# Altium PCB ControlTemp.PcbDoc
Units mm, origin at the board's own origin, x right, y up, seen from the top; angles counter-clockwise.
Board outline 88.2 x 92.5 mm, 2 copper layers (Top Layer, Bottom Layer); 32 components, 37 nets, 127 pads, 1 vias.
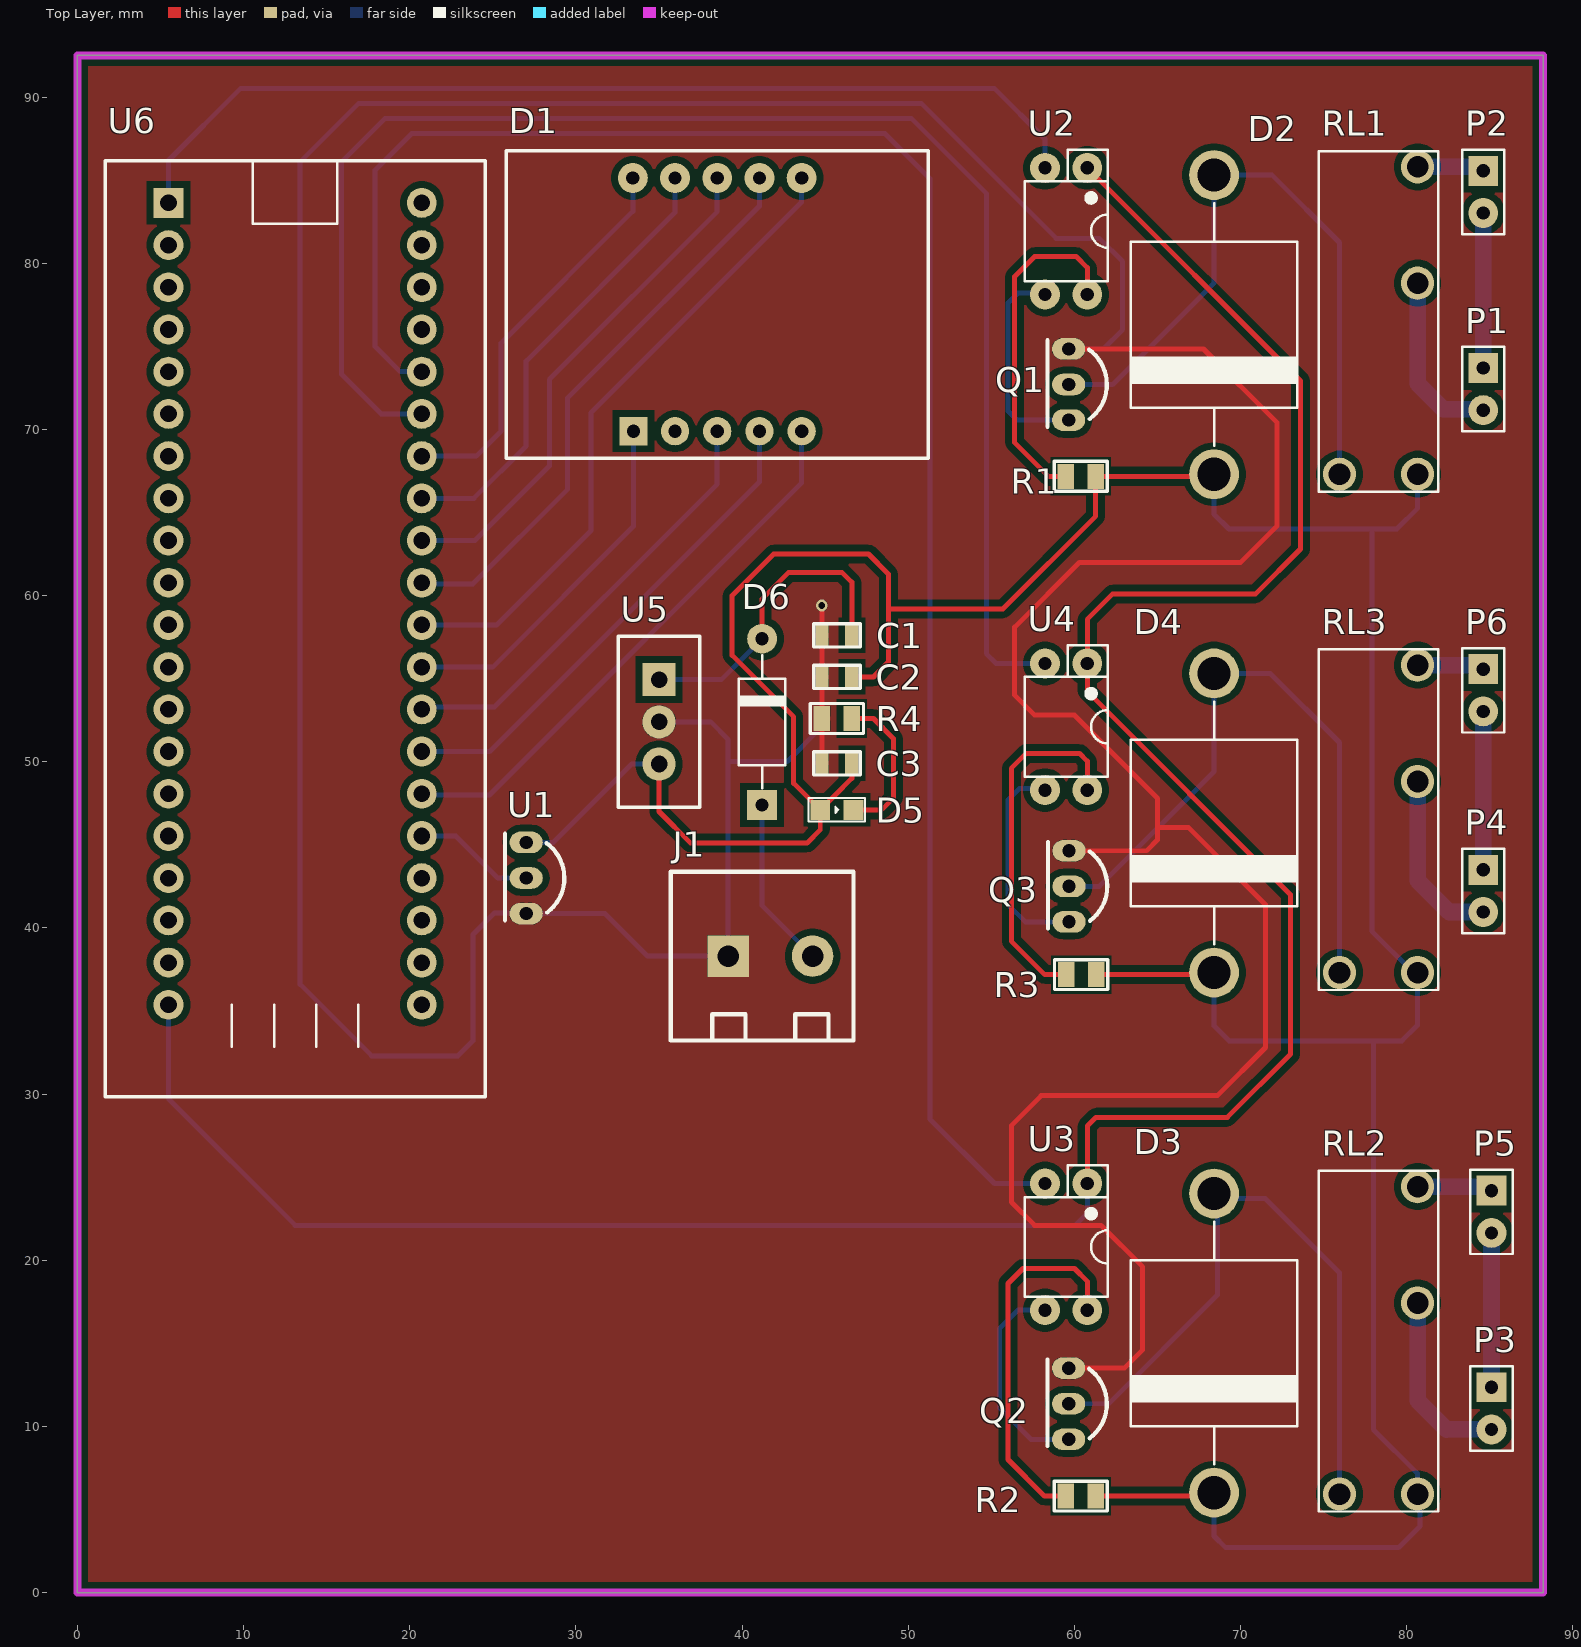
[diagram p0: Top Layer view]
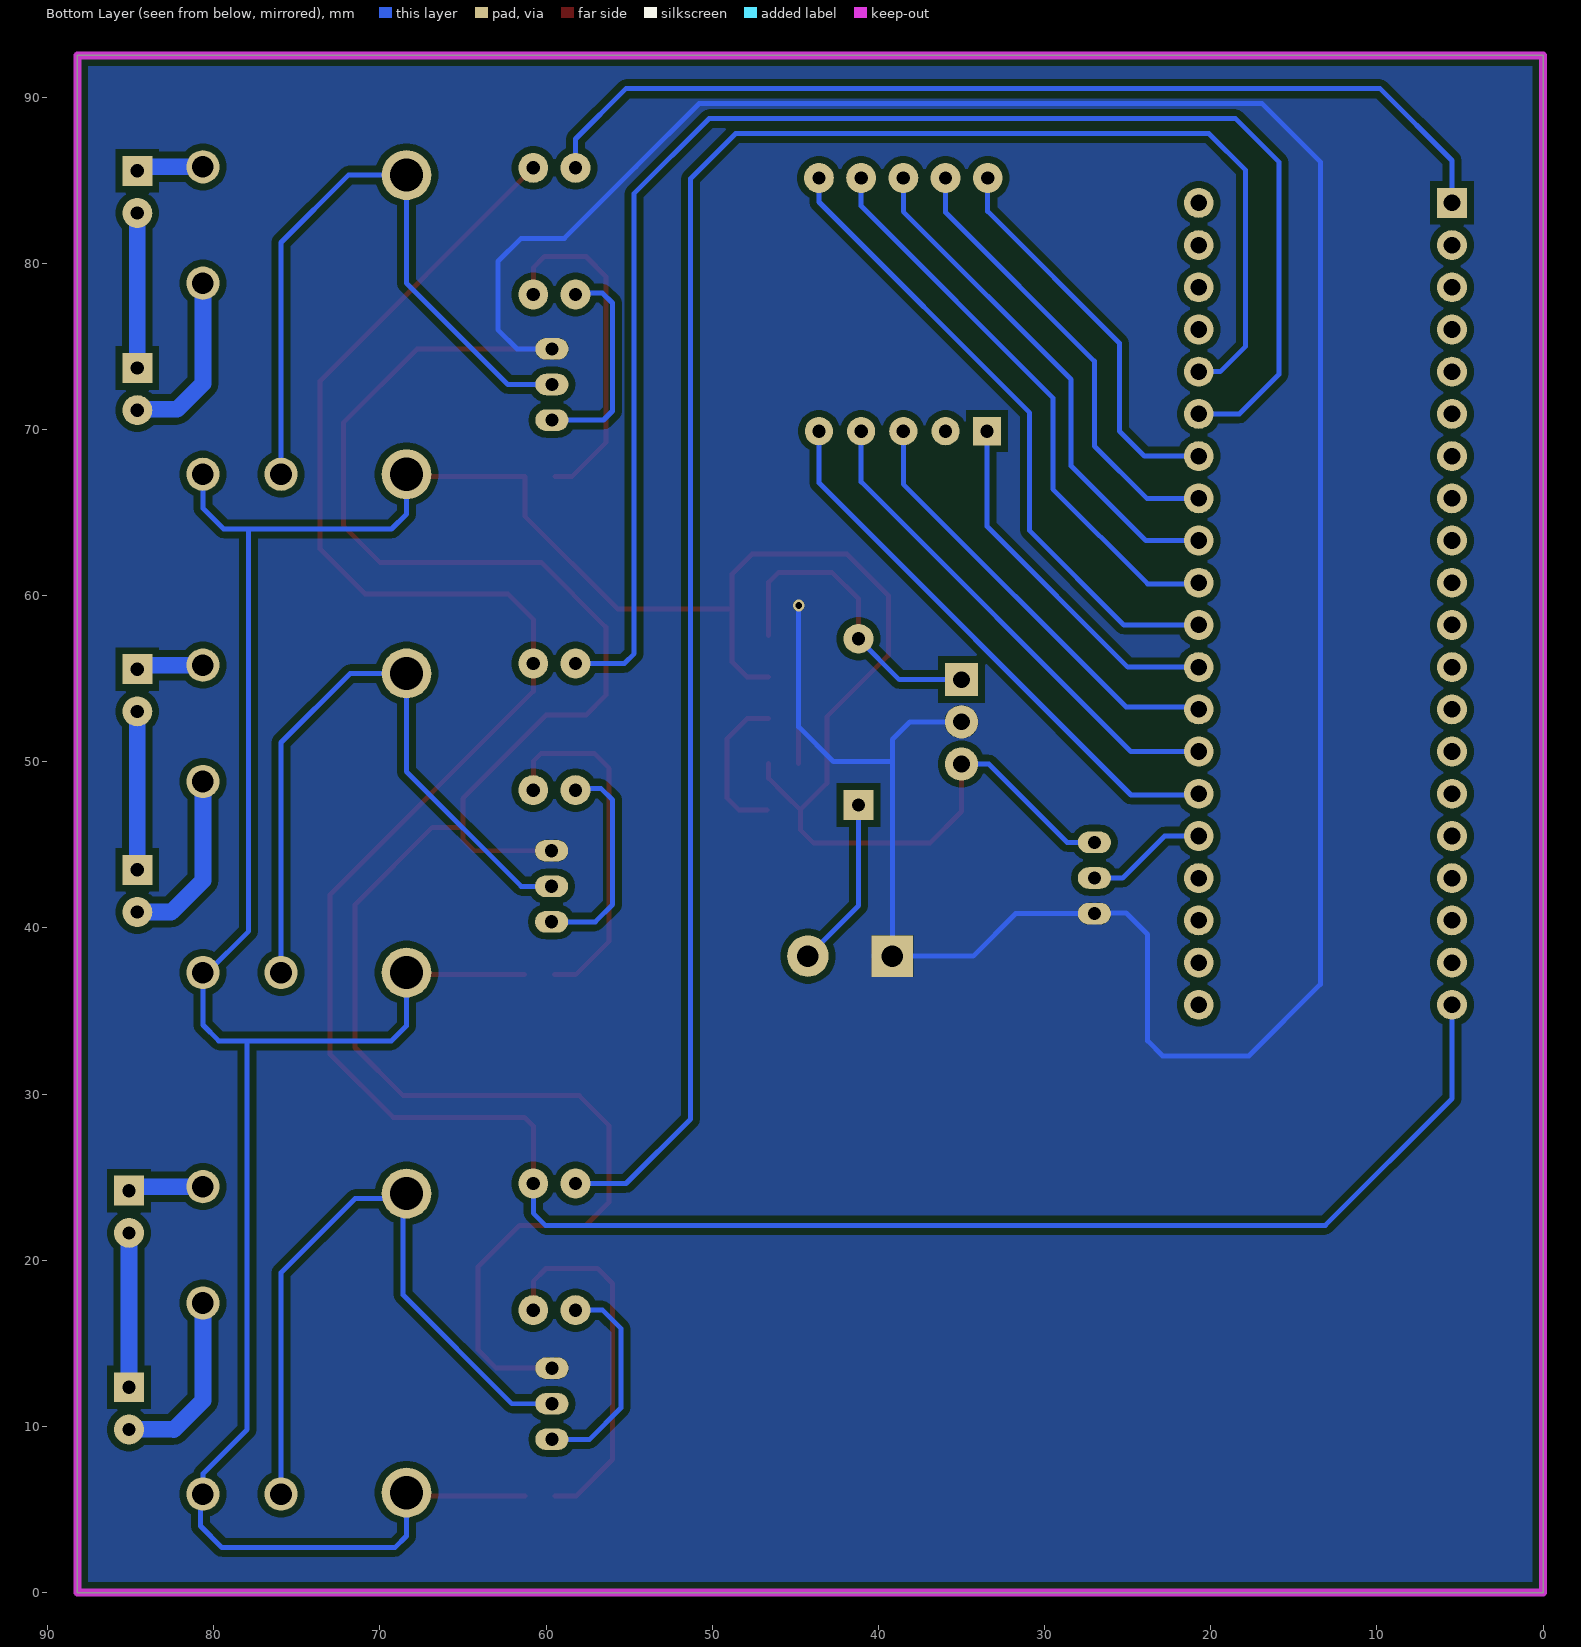
[diagram p1: Bottom Layer view, seen from below]
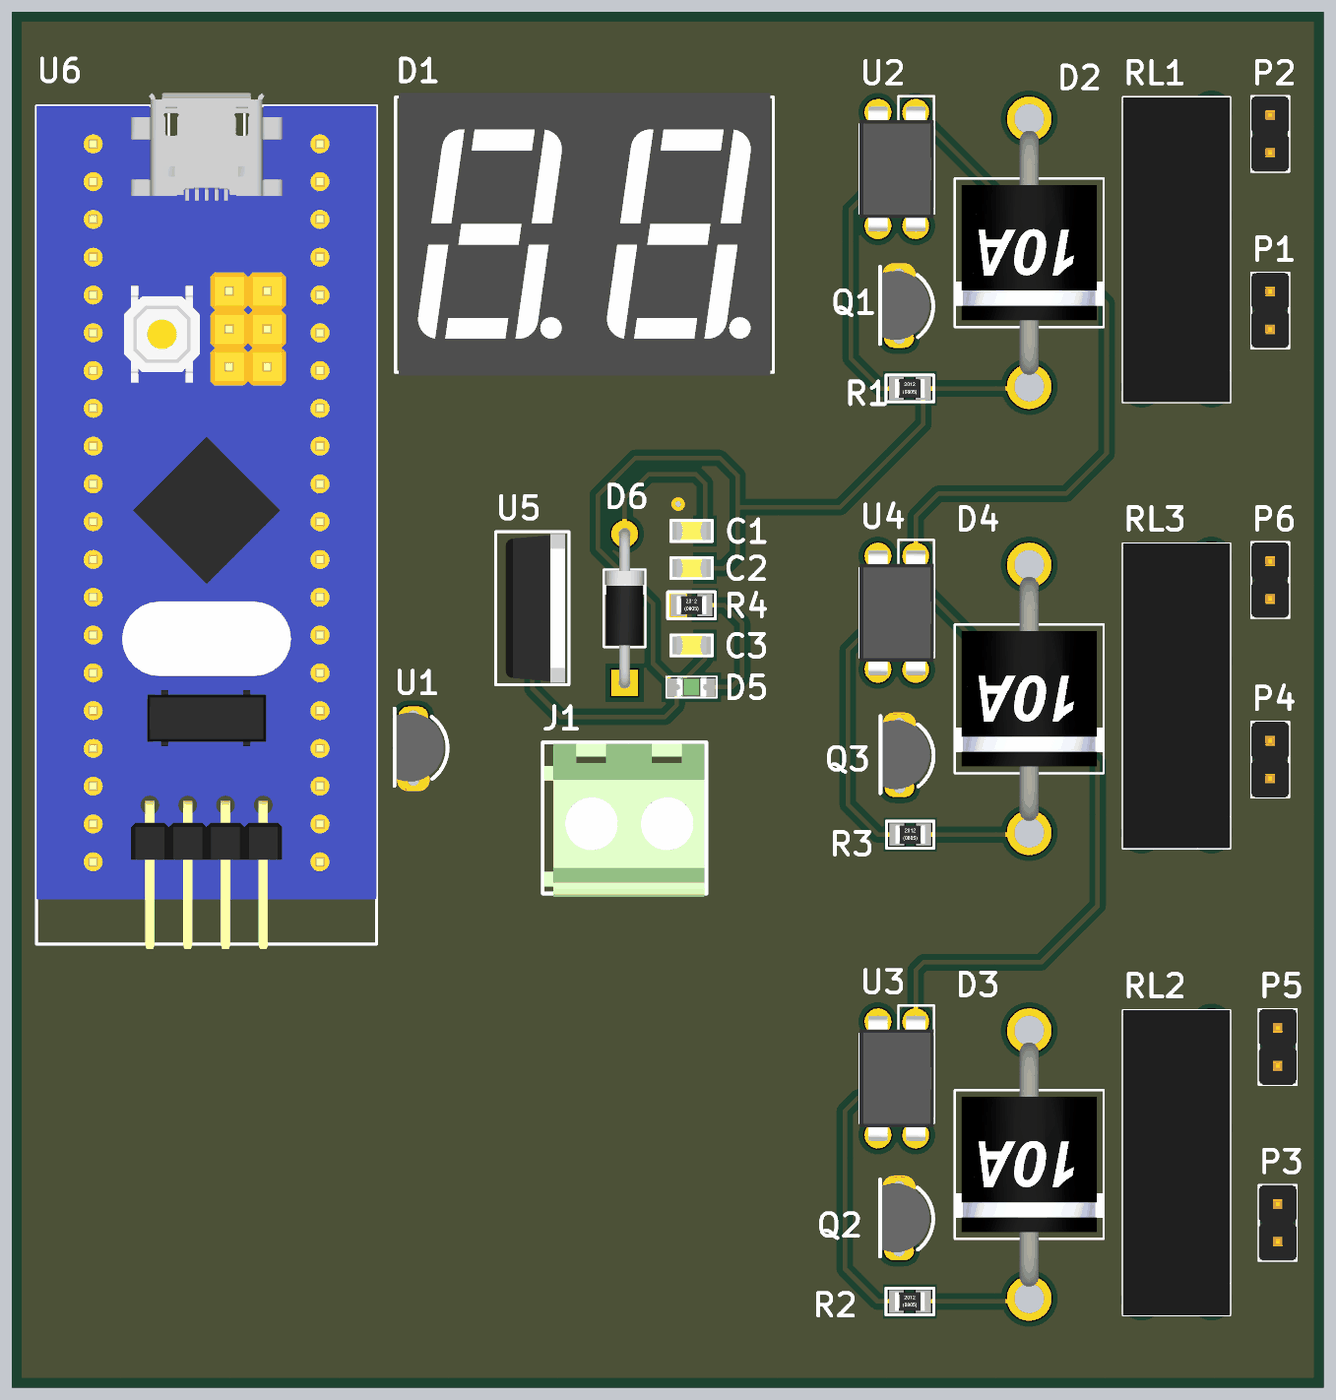
[diagram p2: 3D render of the assembled board from above, using the file's embedded part models]

## Layer stack, top to bottom
Top Solder: solder mask 0.0102, Solder Resist, Dk 3.5
Top Layer: signal copper 0.0356
Dielectric 1: dielectric 0.32, FR-4, Dk 4.8
Bottom Layer: signal copper 0.0356
Bottom Solder: solder mask 0.0102, Solder Resist, Dk 3.5

## Board outline
0,0 0,92.5 88.2,92.5 88.2,0

## Design rules (kind name [scope] priority, off if disabled: settings)
Clearance [All] p1: gap=0.4 ignorepadtopadclearanceinfootprint=FALSE
PlaneClearance [All] p1: clearance=0.3
PlaneConnect [All] p1: planeconnectstyle=Relief reliefexpansion=0.2 reliefentries=4 reliefconductorwidth=0.2 reliefairgap=0.2
PolygonConnect [InNetClass('Load_Class')] p1: connectstyle=Direct reliefconductorwidth=0.254 reliefentries=4 polygonreliefangle="90 Angle" airgapwidth=0.254
RoutingVias RoutingVias_Display [InNetClass('Display_Class')] p1: holewidth=0.4 width=0.7 viastyle="Through Hole" minholewidth=0.4 minwidth=0.7 maxholewidth=0.4 maxwidth=0.7
RoutingVias RoutingVias_Power_SenAct [InNetClass('Power_SenAct_Class')] p2: holewidth=0.7 width=1.1 viastyle="Through Hole" minholewidth=0.7 minwidth=1.1 maxholewidth=0.7 maxwidth=1.1
RoutingVias RoutingVias_Power_MCU [InNetClass('Power_MCU_Class')] p3: holewidth=0.7 width=1.1 viastyle="Through Hole" minholewidth=0.7 minwidth=1.1 maxholewidth=0.7 maxwidth=1.1
RoutingVias RoutingVias_Other [All] p4: holewidth=0.4 width=0.7 viastyle="Through Hole" minholewidth=0.4 minwidth=0.7 maxholewidth=0.4 maxwidth=0.7
SolderMaskExpansion [All] p1: expansion=0.102 istentingtop=FALSE
Width Width_Load [InNetClass('Load_Class')] p1: maxlimit=1 minlimit=1 preferedwidth=1
Width Width_Other [InNetClass('All Nets')] p2: maxlimit=0.3 minlimit=0.3 preferedwidth=0.3
28 further rules are at their usual default settings.

## Classes and differential pairs
net class Load_Class: NetP1_1 NetP1_2 NetP2_1 NetP3_1 NetP3_2 NetP4_1 NetP4_2 NetP5_1 NetP6_1
component class [02]-STM32F030C8T6: U6

## Components (designator, comment, footprint, x,y, rotation, side; value= is the part's Value field where it differs from the comment)
C1 "100uF" CAPC0805 45.7,57.6 r0 top
C2 "100uF" CAPC0805 45.7,55.1 r0 top
C3 "100uF" CAPC0805 45.7,49.9 r0 top
D1 "7 Segment 2 Figures" 5621BS 38.5,77.51 r0 top
D2 "Diode" 10A10 68.4,76.3 r270 top
D3 "Diode" 10A10 68.4,15.01 r270 top
D4 "Diode" 10A10 68.4,46.31 r270 top
D5 "LED_Green" "LED SMD 0805" 45.7,47.1 r0 top
D6 "1N400x" 1N400x 41.2,51.898 r90 top
J1 "12Vin" domino_2_pin 41.7,38.3 r0 top
P1 "Header 1*2 Pins" HDR_M_2_PINS_2.54 84.6,72.423 r270 top
P2 "Header 1*2 Pins" HDR_M_2_PINS_2.54 84.6,84.287 r270 top
P3 "Header 1*2 Pins" HDR_M_2_PINS_2.54 85.1,11.083 r270 top
P4 "Header 1*2 Pins" HDR_M_2_PINS_2.54 84.6,42.223 r270 top
P5 "Header 1*2 Pins" HDR_M_2_PINS_2.54 85.1,22.912 r270 top
P6 "Header 1*2 Pins" HDR_M_2_PINS_2.54 84.6,54.296 r270 top
Q1 "NPN" to-92 59.648,72.7 r270 top
Q2 "NPN" to-92 59.648,11.36 r270 top
Q3 "NPN" to-92 59.673,42.5 r270 top
R1 "10kR" RESC0805 60.375,67.175 r0 top
R2 "10kR" RESC0805 60.375,5.8 r0 top
R3 "10kR" RESC0805 60.4,37.185 r0 top
R4 "220R" RESC0805 45.7,52.6 r0 top
RL1 "Relay" "Relay G5NB" 78.3,76.5 r90 top
RL2 "Relay" "Relay G5NB" 78.3,15.125 r90 top
RL3 "Relay" "Relay G5NB" 78.3,46.51 r90 top
U1 "Sensor" to-92 27,43 r270 top
U2 "Optocoupler" "DIP 4" 59.5,81.927 r270 top
U3 "Optocoupler" "DIP 4" 59.5,20.8 r270 top
U4 "Optocoupler" "DIP 4" 59.5,52.1 r270 top
U5 "LM7805" LM7805 35,52.398 r270 top
U6 "STM32F103C8T6_BluePill" STM32F103C8T6_BluePill 13.1,59.5 r0 top

## Footprints (in the part's own frame and the unit in brackets; to place one, negate y for a bottom-side part, rotate by r counter-clockwise, add the part's x,y. Pads: shape width x height; smd on the part's side, far side on the other; paste and mask are expansions set on the pad)
1N400x [mm] "x = 1,...,7"
  rect 1.8x1.8 hole 0.8: 1(-4.5,0)
  round 1.8 hole 0.8: 2(5.5,0)
  silkscreen extent -3.5,-1.4 4.5,1.4, body extent -4.85,-1.25 5.86,1.25, height 2.6
10A10 [mm] "Diode 10A"
  round 3 hole 2: 1(-9,0) 2(9,0)
  silkscreen extent -7.3,-5 7.3,5, body extent -8.2,-4.55 8.2,4.55, height 9.55
5621BS [mm] "0.56 inches, 10 pins"
  rect 1.7x1.7 hole 0.8: 1(-5.04,-7.62)
  round 1.7 hole 0.8: 2(-2.54,-7.62) 3(0,-7.62) 4(2.54,-7.62) 5(5.08,-7.62)
  round 1.8 hole 0.8: 6(5.08,7.62) 7(2.54,7.62) 8(0,7.62) 9(-2.54,7.62) 10(-5.08,7.62)
  silkscreen extent -12.7,-9.25 12.7,9.25, body extent -12.5,-9.46 12.5,9.54, height 8
CAPC0805 [mm] "Length: 2mm, Width: 1.3mm"
  rect 0.8x1.3 smd: 1(-0.9,0) 2(0.9,0)
  silkscreen extent -1.4,-0.7 1.4,0.7, body extent -1,-0.62 1,0.63, height 0.8
"DIP 4" [mm]
  round 1.8 hole 0.8: 1(-3.81,1.27) 2(-3.81,-1.27) 3(3.81,-1.27) 4(3.81,1.27)
  silkscreen extent -4.9,-2.5 3,2.5, body extent -4.57,-2.5 4.57,2.5, height 3.6
domino_2_pin [mm]
  rect 2.5x2.5 hole 1.3: 1(-2.54,0)
  round 2.5 hole 1.3: 2(2.54,0)
  silkscreen extent -6,-5.08 5,5.08, body extent -5.88,-5.3 4.88,5, height 14.19
HDR_M_2_PINS_2.54 [mm] "0.65x0.45, Male, distance = 2.54mm, straight"
  rect 1.8x1.8 hole 0.8: 1(-1.27,0)
  round 1.8 hole 0.8: 2(1.27,0)
  silkscreen extent -2.54,-1.27 2.54,1.27, body extent -2.54,-1.27 2.54,1.27, height 9.89
"LED SMD 0805" [mm] "SMD 0805"
  rect 1.2x1.2 smd: 1(-1,0) 2(1,0)
  silkscreen extent -1.7,-0.7 1.7,0.7, body extent -1,-0.63 1,0.62, height 0.8
LM7805 [mm]
  rect 2x2 hole 1: 1(-2.54,0)
  round 2 hole 1: 2(0,0) 3(2.54,0)
  silkscreen extent -5.15,-2.45 5.15,2.45, body extent -5,-1.8 5,2.21, height 21
"Relay G5NB" [mm] "4 Pins"
  round 2 hole 1.3: 1(-9.2,-2.35) 2(2.3,-2.35) 3(9.3,-2.35) 4(-9.2,2.35)
  silkscreen extent -10.25,-3.6 10.25,3.6, body extent -10.25,-3.6 10.25,3.6, height 15.3
RESC0805 [mm] "Length: 2mm, Width: 1.3mm"
  rect 1x1.5 smd: 1(-0.9,0) 2(0.9,0)
  silkscreen extent -1.6,-0.9 1.6,0.9, body extent -1,-0.62 1,0.63, height 0.45
STM32F103C8T6_BluePill [mm] "STM32F103C8T6_BluePill"
  rect 1.8x1.8 hole 1: 1(-7.62,24.13)
  round 1.8 hole 1: 2(-7.62,21.59) 3(-7.62,19.05) 4(-7.62,16.51) 5(-7.62,13.97) 6(-7.62,11.43) 7(-7.62,8.89) 8(-7.62,6.35) 9(-7.62,3.81) 10(-7.62,1.27) 11(-7.62,-1.27) 12(-7.62,-3.81) 13(-7.62,-6.35) 14(-7.62,-8.89) 15(-7.62,-11.43) 16(-7.62,-13.97) 17(-7.62,-16.51) 18(-7.62,-19.05) 19(-7.62,-21.59) 20(-7.62,-24.13) 21(7.62,-24.13) 22(7.62,-21.59) 23(7.62,-19.05) 24(7.62,-16.51) 25(7.62,-13.97) 26(7.62,-11.43) 27(7.62,-8.89) 28(7.62,-6.35) 29(7.62,-3.81) 30(7.62,-1.27) 31(7.62,1.27) 32(7.62,3.81) 33(7.62,6.35) 34(7.62,8.89) 35(7.62,11.43) 36(7.62,13.97) 37(7.62,16.51) 38(7.62,19.05) 39(7.62,21.59) 40(7.62,24.13)
  silkscreen extent -11.43,-29.67 11.43,26.67, body extent -11.43,-30.01 11.43,27.55, height 12.77
to-92 [mm] "TO-92"
  oval 1.3x2 hole 0.8: 1(-2.14,0) 2(0,0) 3(2.14,0)
  silkscreen extent -2.66,-1.27 2.54,2.3, body extent -2.38,-1.14 2.26,2.06, height 5

## Part data
C1 C2 C3: library part "Capacitor Non Polar", "Capacitor_Non_Polar"
D2 D3 D4: library part 10A10, "Diode 10A"
D6: library part "Diode 1N4007", "1A - 1kV"
J1: library part "Domino 2 Pin", "2 Pins, 5.08mm"
P1 P2 P3 P4 P5 P6: library part "Header 1x2 Pins"
Q1 Q2 Q3: library part 2SC1815, "Transistor NPN"
R1 R2 R3 R4: library part Resistor, "Resistor_TH_1/4W"
RL1 RL2 RL3: library part "Relay G5NB", "4 Pins"
U1: library part LM35, "Temperature sensor"
U2 U3 U4: "Opto"
U5: "5V, 1A"
U6: "STM32F103C8T6 BluePill"

## Via types
v1: diameter 0.7, hole 0.4, Top Layer to Bottom Layer, 1 vias

## Nets (pads, with @x,y where several pads share a name; then routed paths per layer and width w, separated by ;. In a path a pad name is that pad's centre, name@x,y a point inside that pad or via, vN(x,y) a via of type N, cw(c..) or ccw(c..) an arc to the next point about the centre after c; other vN are vias at no path point)
5V: C2.2 C3.2 D2.2 D3.2 D4.2 D5.1 R1.2 R2.2 R3.2 RL1.1 RL2.1 RL3.1 U1.1 U5.3 | length 212.2
  Top Layer w0.3: U5.3 35,47 36.9,45.1 43.9,45.1 44.7,45.9 D5.1 ; C3.2 46.6,49 45.6,48 D5.1 ; C2.2 47.9,55.1 48.8,56 48.8,59.2 ; R2.2 68.19,5.8 D3.2 ; R3.2 68.275,37.185 D4.2 ; D2.2 68.275,67.175 R1.2 61.275,64.775 55.7,59.2 48.8,59.2 ; D5.1 43.1,48.7 43.1,52.7 39.4,56.4 39.4,60 41.9,62.5 47.6,62.5 48.8,61.3 48.8,59.2
  Bottom Layer w0.3: U1.1 28.64,45.14 33.358,49.858 U5.3 ; D3.2 68.4,3.4 69.1,2.7 79.5,2.7 80.8,4 80.8,5.775 RL2.1 80.65,7.15 78,9.8 78,33.2 ; D4.2 68.4,34.1 69.3,33.2 78,33.2 ; D2.2 68.4,64.9 69.3,64 77.9,64 ; RL1.1 80.65,65.25 79.4,64 77.9,64 ; 77.9,64 77.9,39.8 80.39,37.31 RL3.1 80.65,34.15 79.7,33.2 78,33.2
GND: C1.1 C2.1 C3.1 J1.1 Q1.1 Q2.1 Q3.1 R4.1 U1.3 U5.2 | length 309.7
  Top Layer w0.3: C3.1 R4.1 C2.1 C1.1 v1(44.8,59.4) ; Q2.1 63,13.5 64.1,14.6 64.1,19.6 61.6,22.1 57.6,22.1 56.2,23.5 56.2,28.1 58,29.9 68.6,29.9 71.5,32.8 71.5,41.4 66.85,46.05 65,46.05 ; Q1.1 67.76,74.84 72.2,70.4 72.2,64.2 70,62 60.3,62 56.4,58.1 56.4,54 57.6,52.8 60,52.8 65,47.8 65,46.05 ; Q3.1 64.34,44.64 65,45.3 65,46.05
  Bottom Layer w0.3: U5.2 38.102,52.398 39.16,51.34 39.16,50 ; v1(44.8,59.4) 44.8,52.1 42.7,50 39.16,50 ; Q1.1 61.74,74.84 62.9,76 62.9,80.1 61.5,81.5 58.9,81.5 54.6,85.8 50.8,89.6 16.9,89.6 13.4,86.1 13.4,36.6 17.7,32.3 22.9,32.3 23.8,33.2 23.8,39.6 25.1,40.9 26.96,40.9 U1.3 31.74,40.86 34.3,38.3 J1.1 39.16,50
NetC1_2: C1.2 D6.2 U5.1 | length 19.1
  Top Layer w0.3: D6.2 41.2,59.8 42.8,61.4 46,61.4 46.6,60.8 C1.2
  Bottom Layer w0.3: U5.1 38.74,54.938 D6.2
NetD1_1: D1.1 U6.29 | length 22
  Bottom Layer w0.3: U6.29 24.99,55.69 33.46,64.16 D1.1
NetD1_3: D1.3 U6.28 | length 26.6
  Bottom Layer w0.3: U6.28 20.87,53.3 25.1,53.3 38.5,66.7 D1.3
NetD1_4: D1.4 U6.27 | length 30.1
  Bottom Layer w0.3: U6.27 24.81,50.61 41.04,66.84 D1.4
NetD1_5: D1.5 U6.26 | length 33.8
  Bottom Layer w0.3: U6.26 20.79,48 24.8,48 43.58,66.78 D1.5
NetD1_6: D1.6 U6.30 | length 39
  Bottom Layer w0.3: U6.30 25.23,58.23 30.9,63.9 30.9,71 43.58,83.68 D1.6
NetD1_7: D1.7 U6.31 | length 34.7
  Bottom Layer w0.3: U6.31 20.79,60.7 23.8,60.7 29.5,66.4 29.5,71.9 41.04,83.44 D1.7
NetD1_8: D1.8 U6.32 | length 31.1
  Bottom Layer w0.3: U6.32 23.91,63.31 28.4,67.8 28.4,73 38.5,83.1 D1.8
NetD1_9: D1.9 U6.33 | length 27.4
  Bottom Layer w0.3: U6.33 23.85,65.85 27,69 27,74.1 35.96,83.06 D1.9
NetD1_10: D1.10 U6.34 | length 23.9
  Bottom Layer w0.3: U6.34 23.99,68.39 25.5,69.9 25.5,75.2 33.42,83.12 D1.10
NetD2_1: D2.1 Q1.2 RL1.4 | length 41
  Bottom Layer w0.3: Q1.2 62.3,72.7 68.4,78.8 D2.1 71.9,85.3 75.95,81.25 RL1.4
NetD3_1: D3.1 Q2.2 RL2.4 | length 40.4
  Bottom Layer w0.3: Q2.2 62.06,11.36 68.6,17.9 68.6,23.7 D3.1@68.6,23.81 ; D3.1 D3.1@68.6,23.81 ; RL2.4 75.95,19.25 71.5,23.7 68.71,23.7 D3.1@68.6,23.81
NetD4_1: D4.1 Q3.2 RL3.4 | length 40.6
  Bottom Layer w0.3: Q3.2 61.5,42.5 68.4,49.4 D4.1 68.41,55.3 71.8,55.3 75.95,51.15 RL3.4
NetD5_2: D5.2 R4.2 | length 9.3
  Top Layer w0.3: R4.2 47.9,52.6 49.1,51.4 49.1,47.8 48.4,47.1 D5.2
NetD6_1: D6.1 J1.2 | length 10.4
  Bottom Layer w0.3: D6.1 41.2,41.34 J1.2
NetP1_1: P1.1 P2.2 | length 9.3
  Bottom Layer w1: P1.1 P2.2
NetP1_2: P1.2 RL1.2 | length 10.7
  Bottom Layer w1: RL1.2 80.65,72.75 82.2,71.2 84.553,71.2 P1.2
NetP2_1: P2.1 RL1.3 | length 4.1
  Bottom Layer w1: RL1.3 84.357,85.8 P2.1
NetP3_1: P3.1 P5.2 | length 9.3
  Bottom Layer w1: P3.1 P5.2
NetP3_2: P3.2 RL2.2 | length 11.1
  Bottom Layer w1: RL2.2 80.65,11.55 82.4,9.8 82.413,9.813 P3.2
NetP4_1: P4.1 P6.2 | length 9.5
  Bottom Layer w1: P4.1 P6.2
NetP4_2: P4.2 RL3.2 | length 10.7
  Bottom Layer w1: RL3.2 80.65,42.85 82.547,40.953 P4.2
NetP5_1: P5.1 RL2.3 | length 4.6
  Bottom Layer w1: RL2.3 84.857,24.425 P5.1
NetP6_1: P6.1 RL3.3 | length 4.1
  Bottom Layer w1: RL3.3 84.357,55.81 P6.1
NetQ1_3: Q1.3 U2.3 | length 12.9
  Bottom Layer w0.3: U2.3 58.147,78.2 56.6,78.2 56,77.6 56,71.1 56.54,70.56 Q1.3
NetQ2_3: Q2.3 U3.3 | length 12.9
  Bottom Layer w0.3: U3.3 56.59,16.99 55.5,15.9 55.5,11.1 57.38,9.22 Q2.3
NetQ3_3: Q3.3 U4.3 | length 13
  Bottom Layer w0.3: U4.3 58.12,48.4 56.7,48.4 56,47.7 56,41.4 57.04,40.36 Q3.3
NetR1_1: R1.1 U2.4 | length 20.7
  Top Layer w0.3: R1.1 58.425,67.175 56.4,69.2 56.4,79.2 57.6,80.4 60.1,80.4 60.77,79.73 U2.4
NetR2_1: R2.1 U3.4 | length 22.2
  Top Layer w0.3: R2.1 58.2,5.8 56,8 56,18.6 56.9,19.5 60,19.5 60.77,18.73 U3.4
NetR3_1: R3.1 U4.4 | length 21.4
  Top Layer w0.3: R3.1 58.215,37.185 56.2,39.2 56.2,49.6 57.1,50.5 60.3,50.5 60.77,50.03 U4.4
NetU1_2: U1.2 U6.25 | length 7.3
  Bottom Layer w0.3: U6.25 22.77,45.53 25.3,43 U1.2
NetU2_1: U2.1 U3.1 U4.1 U6.20 | length 157.7
  Top Layer w0.3: U3.1 60.77,28.07 61.3,28.6 69.2,28.6 73,32.4 73,42 60.77,54.23 U4.1 60.77,58.57 62.3,60.1 70.9,60.1 73.6,62.8 73.6,72.907 U2.1
  Bottom Layer w0.3: U6.20 5.48,29.72 13.1,22.1 60.04,22.1 60.77,22.83 U3.1
NetU2_2: U2.2 U6.1 | length 60.1
  Bottom Layer w0.3: U6.1 5.48,86.18 9.8,90.5 55.2,90.5 58.23,87.47 U2.2
NetU3_2: U3.2 U6.36 | length 114.6
  Bottom Layer w0.3: U6.36 19.43,73.47 17.9,75 17.9,85.6 20.1,87.8 48.6,87.8 51.3,85.1 51.3,28.5 55.19,24.61 U3.2
NetU4_2: U4.2 U6.35 | length 91.8
  Bottom Layer w0.3: U6.35 18.27,70.93 15.9,73.3 15.9,86.1 18.5,88.7 50.2,88.7 54.7,84.2 54.7,56.5 55.29,55.91 U4.2
pads on no net: D1.2 U6.2 U6.3 U6.4 U6.5 U6.6 U6.7 U6.8 U6.9 U6.10 U6.11 U6.12 U6.13 U6.14 U6.15 U6.16 U6.17 U6.18 U6.19 U6.21 U6.22 U6.23 U6.24 U6.37 U6.38 U6.39 U6.40

## Polygon pours and split planes (outlines as drawn)
GND on Bottom Layer "GND_L02_P001" (solid, remove dead copper, pour order 1): 0,92.5 0,0 88.2,0 88.2,92.5
GND on Top Layer "GND_L01_P000" (solid, remove dead copper, pour order 0): 0,92.5 0,0 88.2,0 88.2,92.5

## Keep-outs
Keep-Out Layer:
  the board outline again, w0.5